# EAGLE board LiPo Rider (EAGLE 5.10)
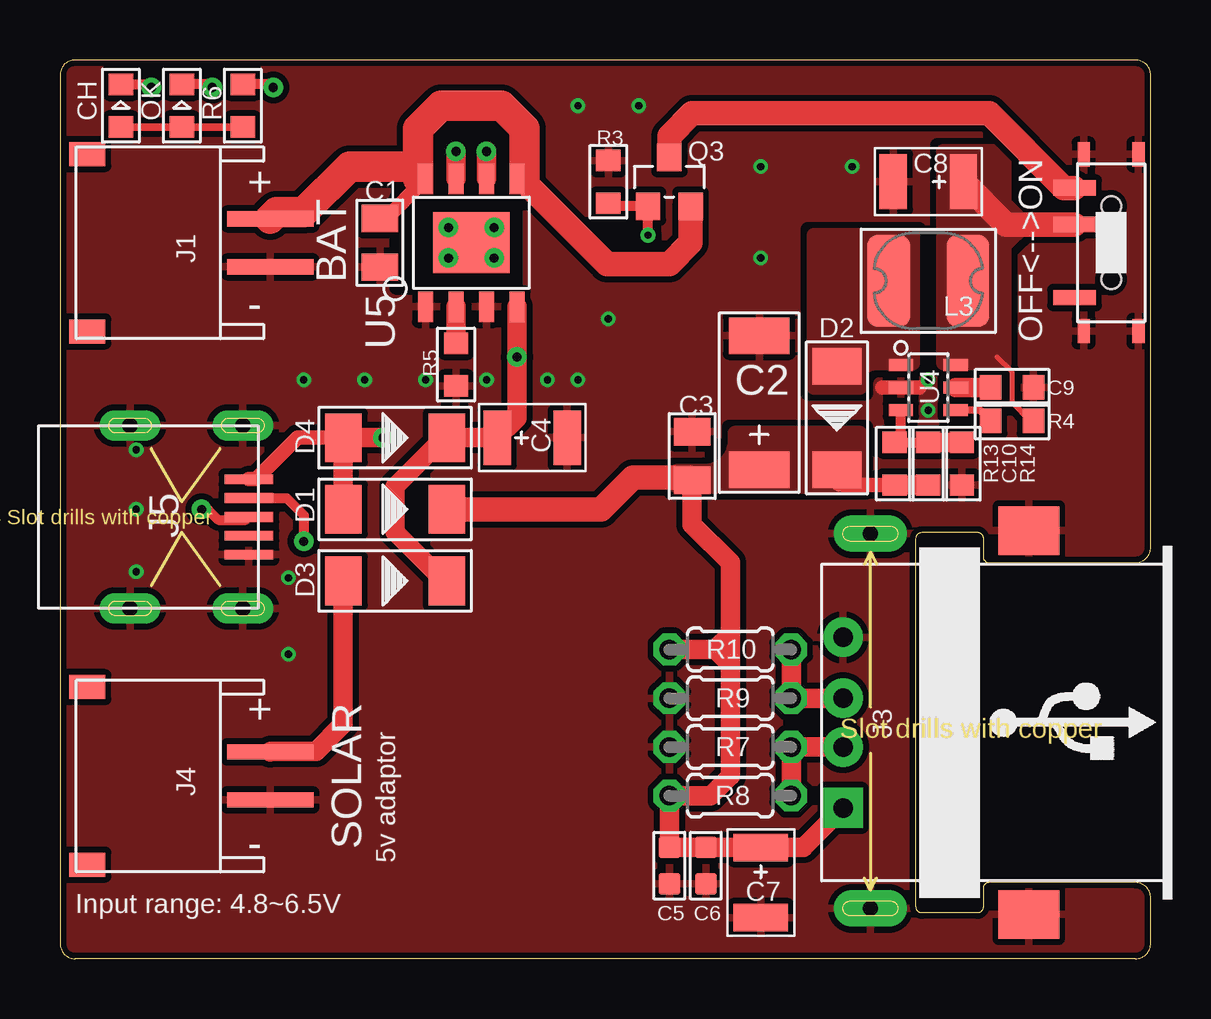
[diagram p0: board, top side]
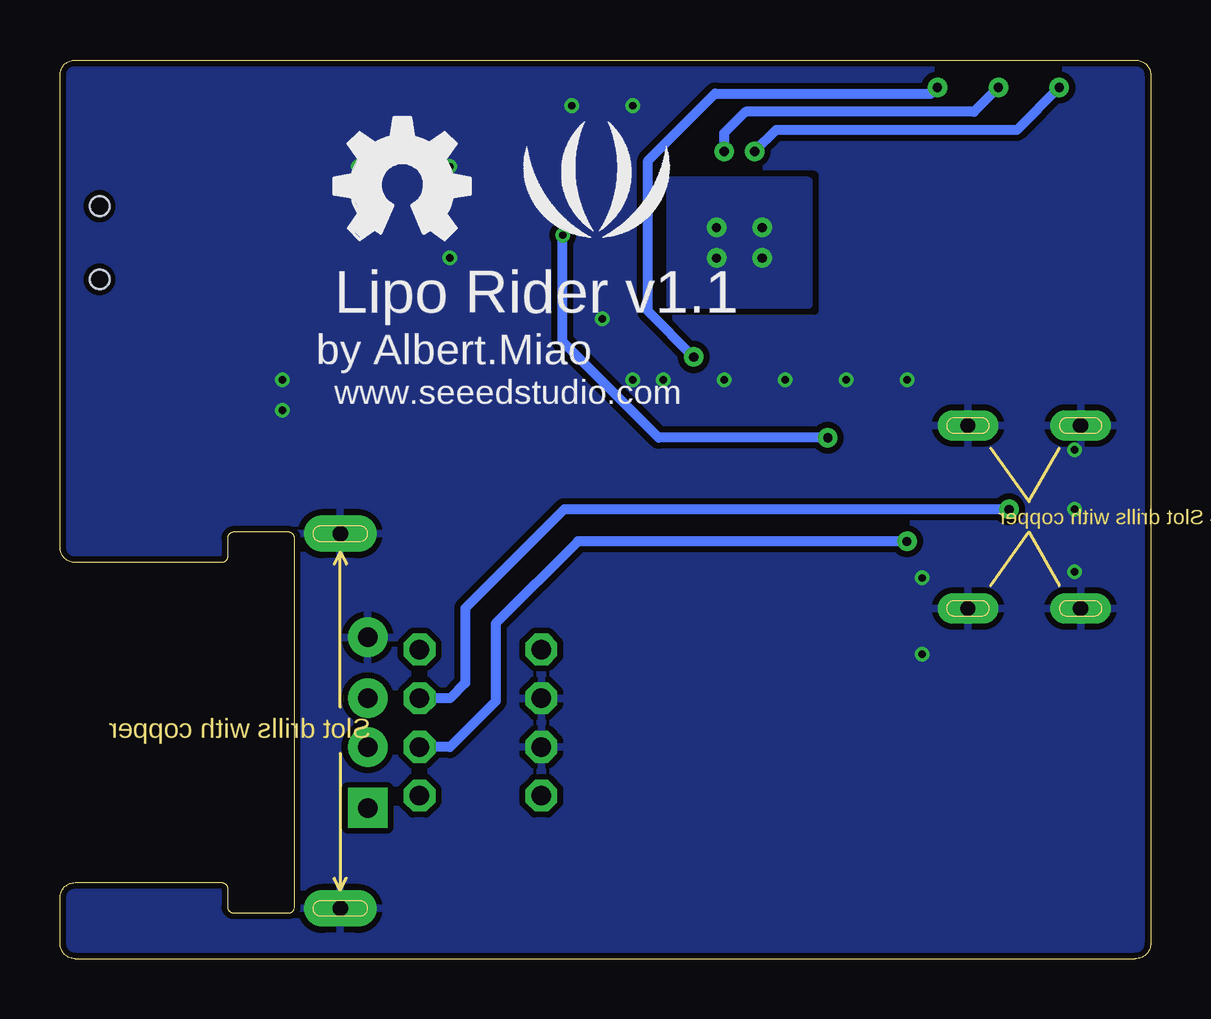
[diagram p1: board, bottom side, seen from below]

Size 45.47 x 37.47 mm. Coordinates in mm from the lower left corner, seen from the top.
Outline: 0.64,37.47 arc90 0,36.83 0,0.64 arc90 0.64,0 44.83,0 arc90 45.47,0.64 45.47,2.54 arc90 44.83,3.17 38.73,3.17 arc90 38.48,2.92 38.48,2.16 arc-90 38.23,1.91 35.94,1.91 arc-90 35.69,2.16 35.69,17.53 arc-90 35.94,17.78 38.23,17.78 arc-90 38.48,17.53 38.48,16.76 arc90 38.73,16.51 44.83,16.51 arc90 45.47,17.14 45.47,36.83 arc90 44.83,37.47 0.64,37.47
Copper layers (1*16): Top 0.035mm / dielectric 1.5mm / Bottom 0.035mm
Design rules "SeeedStudio_rule_no_angle_090911 *": minimum track width 6mil, minimum drill 12mil, track to track 6mil, track to pad 5mil, pad to pad 5mil, via to via 6mil, smd to smd 0mil, copper to edge 10mil, drill to drill 10mil, minimum pad ring 10mil, minimum via ring 6mil, stop-mask expansion 2mil, vias tented up to drill 100mil, thermal gap 10mil
Net classes: 0 default: width 0.203 mm, drill 0.305 mm, clearance 0.127 mm
tRestrict: area 14,27.9 to 19.1,31.8

## Footprints (pad centres in the part's own frame; a part is rotated, then mirrored left to right if it is on the bottom)
0805 = smd 1.143 x 1.524: 1 -1.016,0; 2 1.016,0
AVX_C = smd 1.524 x 2.54: + -2.794,0; - 2.794,0
AVX_B = smd 1.143 x 2.286: + -1.46,0; - 1.46,0
0603@1 = smd 0.889 x 0.889: 1 -0.762,0; 2 0.762,0
0603 = smd 0.889 x 1.016: 1 -0.889,0; 2 0.889,0
LED0603 = smd 0.889 x 1.016: 1 -0.889,0; 2 0.889,0
D2010 = smd 1.524 x 2.032: + -2.159,0; - 2.159,0
JST-SMD-2.0 = smd 0.635 x 3.6: 1 -1,5.08; 2 1,5.08 | smd 1 x 1.5: P$1 -3.7,-2.54; P$2 3.7,-2.54
USB_FEMALE_HALF = drill 0.813 pad 1.651 square: + 0.889,-3.556 | drill 0.813 pad 1.651 round: - 0.889,3.556; DM 0.889,-1.016; DP 0.889,1.016 | smd 2.54 x 2.032: S0 8.636,8.001; S3 8.636,-8.001 | drill 0.635 pad 1.524 long: S1 2.032,7.874; S2 2.032,-7.747
MINI-SMD-5P = smd 2.032 x 0.406: 1 0.381,-1.575; 2 0.381,-0.787; 3 0.381,0; 4 0.381,0.787; 5 0.381,1.575 | drill 0.635 pad 1.27 long: GND@1 0.635,3.81; GND@2 5.334,3.81; GND@3 5.334,-3.81; GND@4 0.635,-3.81
1813 = smd 1.778 x 3.81: 1 -1.651,0; 2 1.651,0
4*8_SW = smd 1.778 x 0.635: A 1.524,2.286; B 1.524,-2.286; COM 1.524,-0.762 | smd 0.508 x 1.016: SS1 -1.143,-3.683; SS2 1.143,-3.683; SS3 1.143,3.683; SS4 -1.143,3.683 | hole 0.813: 0,-1.524; 0,1.524
SOT23@1 = smd 1.016 x 1.143: 1 -0.889,-1.016; 2 0.889,-1.016; 3 0,1.016
0204/5 = drill 0.813 octagon: 1 -2.54,0; 2 2.54,0
SOT23-6 = smd 0.508 x 1.016: 1 -0.94,-1.143; 2 0,-1.143; 3 0.94,-1.143; 4 0.94,1.143; 5 0,1.143; 6 -0.94,1.143
SOP8 = smd 0.635 x 1.27: 1 -1.905,-2.667; 2 -0.635,-2.667; 3 0.635,-2.667; 4 1.905,-2.667; 5 1.905,2.667; 6 0.635,2.667; 7 -0.635,2.667; 8 -1.905,2.667 | smd 3.175 x 2.54: HEAT 0,0

## Placement (x,y rotation side)
C1  1uF  [0805]  13.34,29.84 270 top
C2  10v_100uF  [AVX_C]  29.15,23.18 90 top
C3  1uF  [0805]  26.35,20.95 270 top
C4  B_10v_22uF  [AVX_B]  19.68,21.72 0 top
C5  10nF  [0603@1]  25.4,3.87 90 top
C6  100nF  [0603@1]  26.92,3.87 90 top
C7  B_10v_10uF  [AVX_B]  29.21,3.17 270 top
C8  B_10v_10uF  [AVX_B]  36.2,32.38 180 top
C9  33nF  [0603]  39.69,23.81 180 top
C10  1nF  [0603]  36.2,20.64 270 top
CH  RED  [LED0603]  2.54,35.56 90 top
D1  ss14  [D2010]  13.97,18.73 0 top
D2  ss14  [D2010]  32.38,22.54 270 top
D3  ss14  [D2010]  13.97,15.75 0 top
D4  ss14  [D2010]  13.97,21.72 0 top
J1  BAT  [JST-SMD-2.0]  3.68,29.84 270 top
J3  USB_FEMALE_FEMALE  [USB_FEMALE_HALF]  31.75,9.84 0 top
J4  Solar  [JST-SMD-2.0]  3.68,7.62 270 top
J5  [MINI-SMD-5P]  8.26,18.41 180 top
L3  IDCP-1813-10uH  [1813]  36.2,28.26 180 top
LOGO2  LOGO-OSHW-FILLX0200-NT  [OSHW_FILLX200_NOTEXT]  34.04,29.97 0 bottom
OFF<-->ON  SWITCH_4X7  [4*8_SW]  43.81,29.84 180 top
OK  GREEN  [LED0603]  5.08,35.56 90 top
Q3  si2305ds  [SOT23@1]  25.4,32.38 0 top
R3  10k  [0603]  22.86,32.38 270 top
R4  4.7k  [0603]  39.69,22.42 180 top
R5  3.9k  [0603]  16.51,24.77 90 top
R6  1k  [0603]  7.62,35.56 90 top
R7  [0204/5]  27.94,8.83 180 top
R8  [0204/5]  27.94,6.79 180 top
R9  [0204/5]  27.94,10.86 180 top
R10  [0204/5]  27.94,12.89 180 top
R13  4.5k  [0603]  34.8,20.64 270 top
R14  1.5k  [0603]  37.59,20.64 90 top
U4  AIC1896  [SOT23-6]  36.2,23.81 270 top
U5  CN3083  [SOP8]  17.14,29.84 0 top
U$1  LOGO-SEEEDSTUDIO-SILK  [LOGO_SILK]  23.11,31.75 0 bottom

## Library data of the parts
C1 C3 CH OFF<-->ON OK R3-R6 R13 R14 = CPT_SMD
C2 C4-C8 D1-D4 L3 Q3 R7-R10 = Discrete
C9 C10 = CPT_SMD; C0603: 100N
J1 J4 J5 = Connector
J3 = CONNECTER
LOGO2 U$1 = logo
U4 U5 = ICs_v54

## Nets
!SHDN: R4.2 U4.4
BAT: OFF<-->ON.B Q3.3
BAT_IN: C8.+ L3.1 OFF<-->ON.COM R4.1 U4.6
GND: C1.2 C2.- C3.1 C4.- C5.1 C6.1 C7.- C8.- C9.1 J1.2 J3.- J3.S0 J3.S1 J3.S2 J3.S3 J4.2 J5.5 J5.GND@1 J5.GND@2 J5.GND@3 J5.GND@4 OFF<-->ON.SS1 OFF<-->ON.SS2 OFF<-->ON.SS3 OFF<-->ON.SS4 R3.1 R5.1 R7.2 R9.2 R14.1 U4.2 U5.1 U5.3
LIPO_BAT: C1.1 J1.1 Q3.2 U5.5 U5.8
N$3: D3.+ J4.1
N$6: C9.2 U4.5
N$7: D2.+ L3.2 U4.1
N$8: C10.1 R13.1 R14.2 U4.3
N$13: R5.2 U5.2
N$14: CH.2 U5.7
N$15: OK.2 U5.6
N$16: CH.1 OK.1 R6.1
PD: U5.HEAT
USB5V: D1.+ D4.+ J5.1 Q3.1 R3.2
USB_D+: J3.DP J5.3 R9.1 R10.1
USB_D-: J3.DM J5.2 R7.1 R8.1
VDD5: C2.+ C3.2 C5.2 C6.2 C7.+ C10.2 D1.- D2.- J3.+ R8.2 R10.2 R13.2
VIN: C4.+ D3.- D4.- R6.2 U5.4

## Tracks (layer width: path | path; a pad name or v marks a point on that pad's centre or on a via)
!SHDN
  Top 0.305: U4.4 38.34,22.87 R4.2
BAT
  Top 1.016: OFF<-->ON.B 41.85,32.13 38.73,35.24 26.35,35.24 25.4,34.29 Q3.3
BAT_IN
  Top 0.203: 39.69,23.18 39.69,24.45 39.05,25.08
  Top 0.254: R4.1 40.45,22.42 39.69,23.18
  Top 1.016: OFF<-->ON.COM 39.43,30.61 C8.+
  pour Top (isolate 0.254, no thermals): 39.37,24.83 36.83,24.83 36.83,33.66 39.37,33.66 39.37,31.5 40.26,30.61 39.37,29.72
GND  (via drill 0.3)
  Top 0.61: 35.81,23.81 U4.2 34.29,23.81
  other vias: 36.2,24.13 36.2,22.86 3.17,18.73 3.17,21.21 3.17,16.13 9.53,15.88 9.53,12.7 33.02,33.02 29.21,33.02 29.21,29.21 17.78,24.13 15.24,24.13 12.7,24.13 10.16,24.13 21.59,35.56 24.13,35.56 20.32,24.13 21.59,24.13 22.86,26.67
  pour Top: -5.08,38.1 -3.81,38.1 -3.81,36.83 -5.08,36.83
  pour Top (isolate 0.254, rank 6): -0.64,38.1 46.35,38.1 46.35,-0.64 -0.64,-0.64
  pour Bottom (isolate 0.254, rank 6): -0.64,38.1 46.35,38.1 46.35,-0.64 -0.64,-0.64
LIPO_BAT
  Top 0.61: 14.92,33.34 15.24,33.02 U5.8 13.46,30.73 C1.1 | 19.37,32.51 U5.5
  Top 1.016: 19.37,32.51 19.37,32.38 22.8,28.96 25.4,28.96 26.29,29.84 Q3.2
  Top 1.27: 14.92,33.02 14.92,33.34 14.92,34.61 15.88,35.56 18.41,35.56 19.37,34.61 19.37,32.51 | 14.92,33.02 14.92,32.51 | 14.92,33.02 12.06,33.02 10.16,31.11 9.03,31.11 J1.1
N$3
  Top 0.813: D3.+ 11.81,9.78 10.67,8.64 8.78,8.64 J4.1
N$6
  Top 0.813: U4.5 C9.2
N$7
  pour Top (isolate 0.254, no thermals): 35.56,24.83 33.97,24.83 arc90 33.34,24.19 33.34,23.81 31.43,23.81 31.43,30.16 35.56,30.16
N$8
  Top 0.406: U4.3 35.05,21.78 R13.1 C10.1
  Top 0.813: C10.1 R14.2
N$13
  Top 0.813: R5.2 U5.2
N$14  (via drill 0.38 pad 0.81)
  Top 0.254: CH.2 2.67,36.32
  Top 0.406: CH.2 3.68,36.45 v3.81,36.32
  Top 0.813: v16.51,33.66 U5.7
  Bottom 0.406: v3.81,36.32 5.59,34.54 15.62,34.54 v16.51,33.66
N$15  (via drill 0.38 pad 0.81)
  Top 0.406: OK.2 6.22,36.45 v6.35,36.32
  Top 0.813: v17.78,33.66 U5.6
  Bottom 0.406: v6.35,36.32 7.37,35.31 16.89,35.31 17.78,34.42 v17.78,33.66
N$16
  Top 0.305: CH.1 OK.1 R6.1
PD  (via drill 0.38 pad 0.81)
  Top 0.406: v16.19,29.21 16.51,29.21 U5.HEAT | v16.19,30.48 16.51,30.48 U5.HEAT | v18.1,29.21 17.78,29.21 U5.HEAT | v18.1,30.48 17.78,30.48 U5.HEAT
  pour Bottom (isolate 0.305): 14.29,32.38 20,32.38 20,27.3 14.29,27.3
USB5V  (via drill 0.3, 0.38 pad 0.81)
  Top 0.406: v24.51,30.16 Q3.1 22.99,31.37 R3.2
  Top 0.61: J5.1 8.18,19.99 9.91,21.72 D4.+
  Top 0.813: v13.46,21.72 D4.+ D1.+
  Bottom 0.406: v13.46,21.72 20.51,21.72 24.51,25.72 v24.51,30.16
USB_D+  (via drill 0.38 pad 0.81)
  Top 0.406: v5.91,18.73 6.16,18.73 6.6,18.29 7.75,18.29 J5.3
  Top 0.813: J3.DP R9.1 R10.1
  Bottom 0.406: v5.91,18.73 24.45,18.73 28.57,14.61 28.57,11.49 29.21,10.86 R9.1
USB_D-  (via drill 0.38 pad 0.81)
  Top 0.406: v10.16,17.4 10.16,18.49 9.45,19.2 J5.2
  Top 0.813: J3.DM R7.1 R8.1
  Bottom 0.406: v10.16,17.4 23.88,17.4 27.3,13.97 27.3,10.73 29.21,8.83 R7.1
VDD5
  Top 0.61: R13.2 32.64,19.75 32.51,19.88
  Top 0.813: R13.2 C10.2 | 32.51,19.88 32.38,20 | J3.+ 30.99,4.64 C7.+ C6.2 | 27.94,12.26 27.94,7.62 27.11,6.79 R8.2 C5.2 C6.2 | 27.94,12.26 27.94,13.97 | 27.94,12.26 27.3,12.89 | 27.3,12.89 27.94,13.53 27.94,16.51 26.35,18.1 C3.2 | 27.3,12.89 R10.2 | C6.2 26.67,4.64
  Top 1.016: D1.- 22.54,18.73 23.88,20.07 26.23,20.07 C3.2
  pour Top (isolate 0.254, no thermals): 33.34,19.68 25.72,19.68 25.72,20.32 26.86,20.32 arc90 28.13,21.59 28.13,21.91 33.34,21.91
VIN  (via drill 0.38 pad 0.81)
  Top 0.406: R6.2 8.76,36.45 v8.89,36.32
  Top 0.813: U5.4 v19.05,25.08 19.05,22.54 C4.+ D4.- 16,21.72 13.97,19.68 13.97,17.78 16,15.75 D3.-
  Bottom 0.406: v19.05,25.08 20.95,26.99 20.95,33.27 18.16,36.07 9.14,36.07 v8.89,36.32

## Text on the board
tPlace: + | BAT | - | + | SOLAR | - | 5v adaptor | Input range: 4.8~6.5V
bPlace: Lipo Rider v1.1 | by Albert.Miao | www.seeedstudio.com